# EAGLE board LTC6820 breakout (EAGLE 7.7.0)
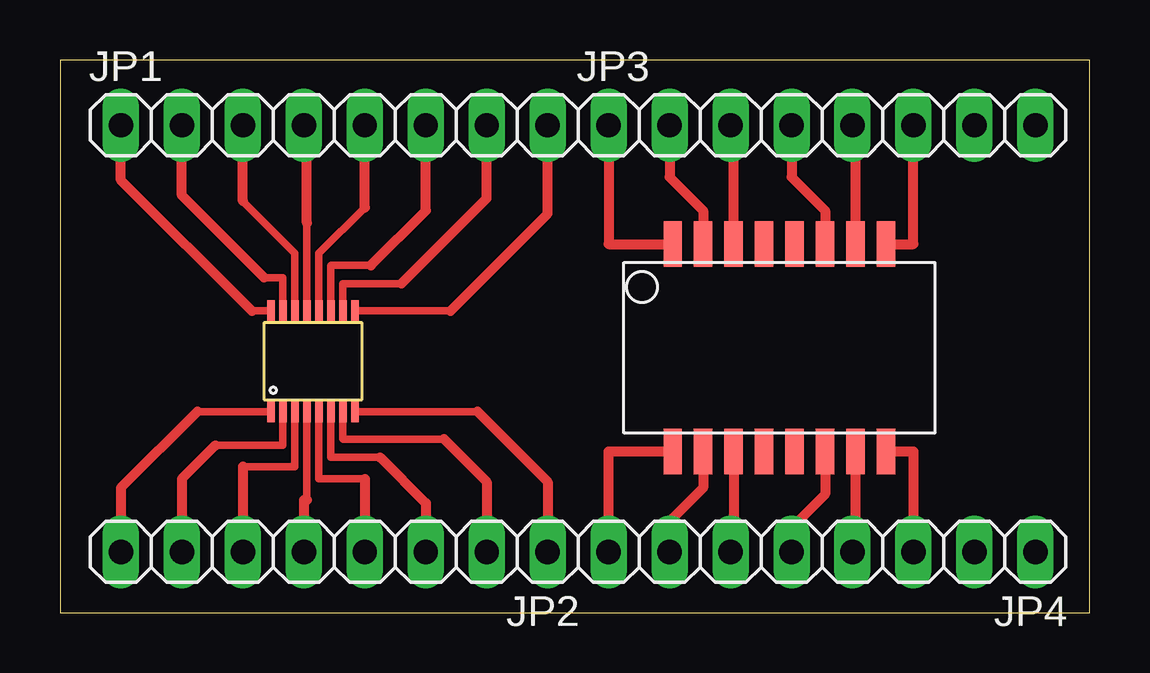
[diagram p0: board, top side]

Size 42.91 x 23.04 mm. Coordinates in mm from the lower left corner, seen from the top.
Outline: 0,0 42.91,0 42.91,23.04 0,23.04 0,0
Copper layers (1*16): Top 0.035mm / dielectric 1.5mm / Bottom 0.035mm
Design rules "default": minimum track width 10mil, minimum drill 24mil, track to track 8mil, track to pad 8mil, pad to pad 8mil, via to via 8mil, smd to smd 8mil, copper to edge 40mil, drill to drill 8mil, minimum pad ring 10mil, minimum via ring 8mil, stop-mask expansion 4mil, vias tented up to drill 0mil, thermal gap 10mil

## Footprints (pad centres in the part's own frame; a part is rotated, then mirrored left to right if it is on the bottom)
1X08 = drill 1.016 long: 1 -8.89,0; 2 -6.35,0; 3 -3.81,0; 4 -1.27,0; 5 1.27,0; 6 3.81,0; 7 6.35,0; 8 8.89,0
MSOP-16 = smd 0.305 x 0.889: 1 -0.1,-0.5; 2 0.4,-0.5; 3 0.9,-0.5; 4 1.4,-0.5; 5 1.9,-0.5; 6 2.4,-0.5; 7 2.9,-0.5; 8 3.4,-0.5; 9 3.4,3.7; 10 2.9,3.7; 11 2.4,3.7; 12 1.9,3.7; 13 1.4,3.7; 14 0.9,3.7; 15 0.4,3.7; 16 -0.1,3.7
749010013 = smd 1.905 x 0.762: 1 4.318,4.445; 2 4.318,3.175; 3 4.318,1.905; 4 4.318,0.635; 5 4.318,-0.635; 6 4.318,-1.905; 7 4.318,-3.175; 8 4.318,-4.445; 9 -4.318,-4.445; 10 -4.318,-3.175; 11 -4.318,-1.905; 12 -4.318,-0.635; 13 -4.318,0.635; 14 -4.318,1.905; 15 -4.318,3.175; 16 -4.318,4.445

## Placement (x,y rotation side)
JP1  [1X08]  11.43,20.32 0 top
JP2  [1X08]  11.43,2.54 180 top
JP3  [1X08]  31.75,20.32 0 top
JP4  [1X08]  31.75,2.54 180 top
U$1  LTC6820  [MSOP-16]  8.89,8.89 0 top
U$2  [749010013]  29.97,11.05 90 top

## Library data of the parts
JP1-JP4 U$1 U$2 = HyTechDevices

## Nets
N$1: JP2.1 U$1.8
N$2: JP2.2 U$1.7
N$3: JP2.3 U$1.6
N$4: JP2.4 U$1.5
N$5: JP2.5 U$1.4
N$6: JP2.6 U$1.3
N$7: JP2.7 U$1.2
N$8: JP2.8 U$1.1
N$9: JP1.1 U$1.16
N$10: JP1.2 U$1.15
N$11: JP1.3 U$1.14
N$12: JP1.4 U$1.13
N$13: JP1.5 U$1.12
N$14: JP1.6 U$1.11
N$15: JP1.7 U$1.10
N$16: JP1.8 U$1.9
N$17: JP4.8 U$2.16
N$18: JP4.7 U$2.15
N$19: JP4.6 U$2.14
N$20: JP3.1 U$2.1
N$21: JP3.2 U$2.2
N$22: JP3.3 U$2.3
S$1: U$2.11
S$2: JP3.6 U$2.8
S$3: U$2.7
S$4: U$2.6

## Tracks (layer width: path | path; a pad name or v marks a point on that pad's centre or on a via)
N$1
  Top 0.305: U$1.8 17.4,8.38
  Top 0.406: 17.4,8.38 20.32,5.46 JP2.1
N$2
  Top 0.305: U$1.7 11.79,7.26 11.81,7.24 16,7.24
  Top 0.406: 16,7.24 17.78,5.46 JP2.2
N$3
  Top 0.305: U$1.6 11.29,6.48 13.34,6.48
  Top 0.406: 13.34,6.48 15.24,4.57 JP2.3
N$4
  Top 0.305: U$1.5 10.79,5.59 12.7,5.59
  Top 0.406: 12.7,5.59 JP2.4
N$5
  Top 0.305: 10.29,2.54 JP2.5 | U$1.4 10.29,4.7
  Top 0.406: 10.29,4.7 10.16,4.7 JP2.5
N$6
  Top 0.305: U$1.3 9.79,6.1 7.62,6.1
  Top 0.406: 7.62,6.1 JP2.6
N$7
  Top 0.305: U$1.2 9.29,7 9.27,6.99 6.48,6.99
  Top 0.406: 6.48,6.99 5.08,5.59 JP2.7
N$8
  Top 0.305: U$1.1 5.72,8.39
  Top 0.406: 5.72,8.39 2.54,5.21 JP2.8
N$9
  Top 0.305: U$1.16 8,12.59 8,12.57
  Top 0.406: 8,12.57 2.54,18.03 JP1.1
N$10
  Top 0.305: U$1.15 9.29,13.97 8.51,13.97
  Top 0.406: 8.51,13.97 5.08,17.4 JP1.2
N$11
  Top 0.305: U$1.14 9.79,14.99 7.62,17.16
  Top 0.406: 7.62,17.16 JP1.3
N$12
  Top 0.305: 10.29,19.05 JP1.4 | U$1.13 10.29,16.25 10.29,16.26
  Top 0.406: 10.29,16.26 10.29,18.92 JP1.4
N$13
  Top 0.305: U$1.12 10.79,14.98 12.7,16.89
  Top 0.406: 12.7,16.89 JP1.5
N$14
  Top 0.305: U$1.11 11.29,14.46 11.3,14.48 12.95,14.48
  Top 0.406: 12.95,14.48 15.24,16.76 JP1.6
N$15
  Top 0.305: U$1.10 11.79,13.72 14.22,13.72
  Top 0.406: 14.22,13.72 17.78,17.27 JP1.7
N$16
  Top 0.305: U$1.9 16.27,12.59
  Top 0.406: 16.27,12.59 20.32,16.64 JP1.8
N$17
  Top 0.406: JP4.8 22.86,6.73 U$2.16
N$18
  Top 0.406: U$2.15 26.8,5.21 25.4,3.81 JP4.7
N$19
  Top 0.406: U$2.14 28.07,2.54 JP4.6
N$20
  Top 0.406: JP3.1 22.86,15.37 U$2.1
N$21
  Top 0.406: JP3.2 25.4,18.16 26.8,16.76 U$2.2
N$22
  Top 0.406: U$2.3 28.07,19.05 JP3.3
N$23
  Top 0.406: 34.54,6.73 35.56,6.73 35.56,2.41
N$24
  Top 0.406: 33.02,2.67 33.15,2.67 33.15,6.6
S$1
  Top 0.406: U$2.11 31.88,4.95 30.48,3.56 30.48,2.41
S$2
  Top 0.406: U$2.8 35.56,15.37 JP3.6
S$3
  Top 0.406: 32.89,20.32 33.15,20.32 U$2.7
S$4
  Top 0.406: 30.48,20.19 30.48,18.16 31.88,16.76 U$2.6